# EAGLE board GWLSensorv7 (EAGLE 9.5.2)
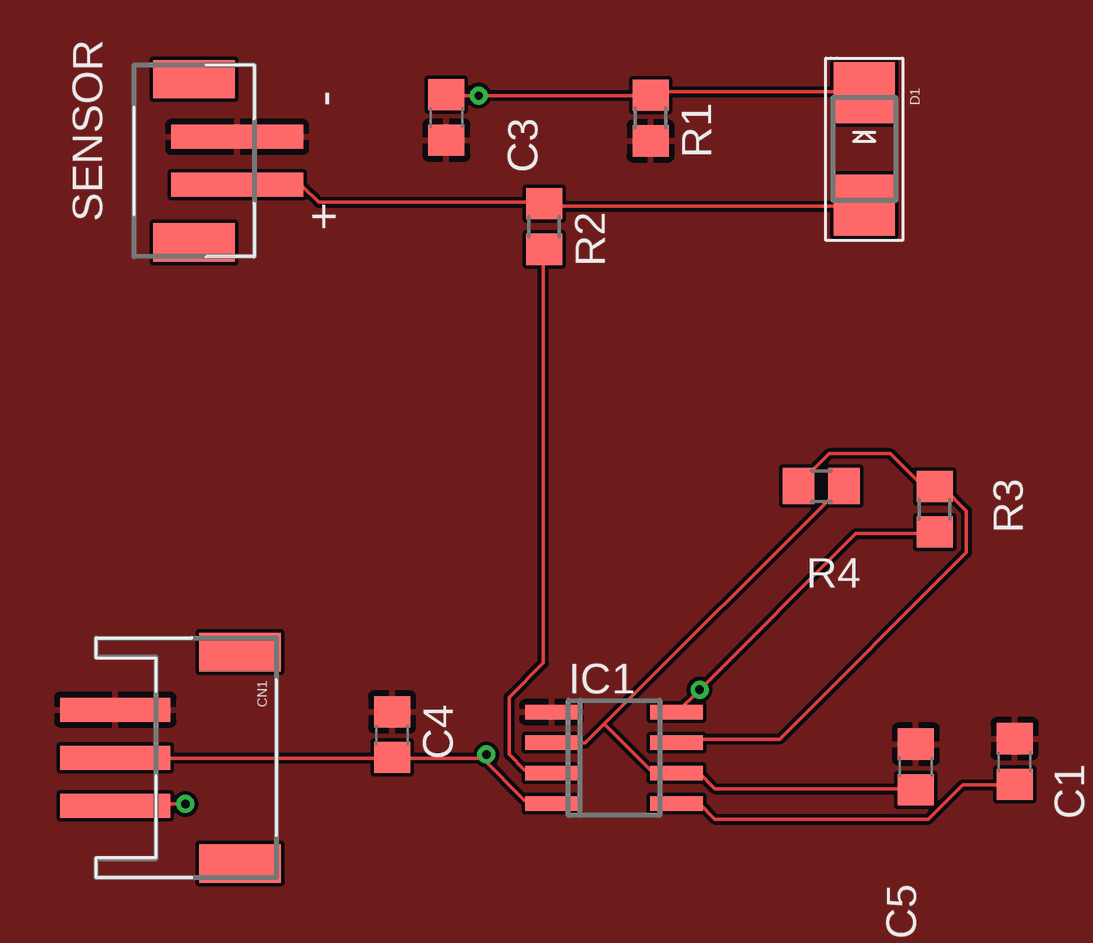
[diagram p0: board, top side]
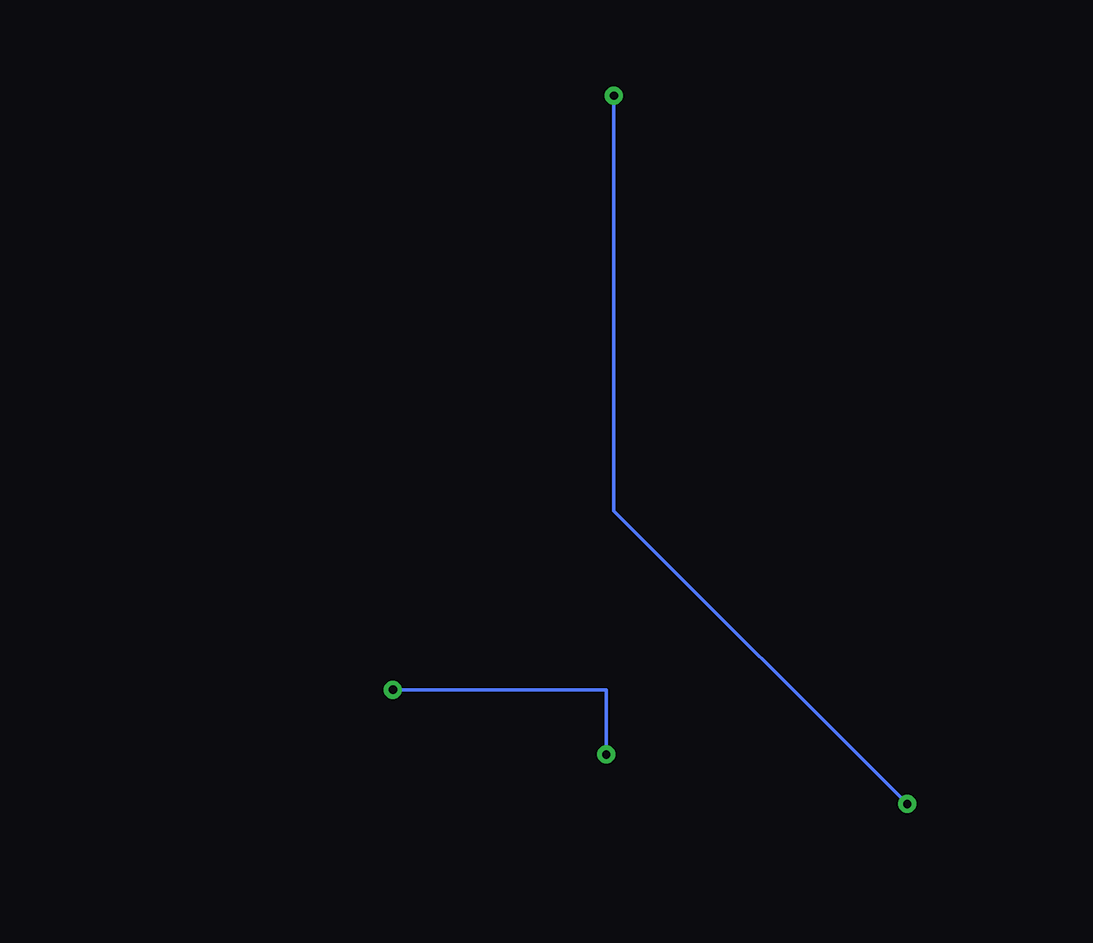
[diagram p1: board, bottom side, seen from below]

No outline drawn. Coordinates in mm, seen from the top.
Copper layers (1*16): Top 0.035mm / dielectric 1.5mm / Bottom 0.035mm
Design rules "default": minimum track width 6mil, minimum drill 0.35mm, track to track 6mil, track to pad 6mil, pad to pad 6mil, via to via 6mil, smd to smd 6mil, copper to edge 40mil, drill to drill 6mil, minimum pad ring 10mil, minimum via ring 8mil, stop-mask expansion 4mil, vias tented up to drill 0mil, thermal gap 10mil

## Footprints (pad centres in the part's own frame; a part is rotated, then mirrored left to right if it is on the bottom)
C0805 = smd 1.3 x 1.5: 1 -0.95,0; 2 0.95,0
JSTPH3 = smd 1 x 4.6: 1 -2,-2.7; 2 0,-2.7; 3 2,-2.7 | smd 1.6 x 3.4: NC1 -4.4,2.5; NC2 4.4,2.5
SMADIODE = smd 2.54 x 2.54: A 2.349,0; C -2.349,0
SO08 = smd 0.6 x 2.2: 1 -1.905,-2.6; 2 -0.635,-2.6; 3 0.635,-2.6; 4 1.905,-2.6; 5 1.905,2.6; 6 0.635,2.6; 7 -0.635,2.6; 8 -1.905,2.6
R0805 = smd 1.3 x 1.5: 1 -0.95,0; 2 0.95,0
JST-PH-2-SMT = smd 1 x 5.5: 1 -1,-1.8; 2 1,-1.8 | smd 1.6 x 3.4: NC1 -3.4,0; NC2 3.4,0

## Placement (x,y rotation side)
C1  10nf  [C0805]  43.28,8.28 270 top
C3  1uF  [C0805]  19.61,35.13 270 top
C4  100nf  [C0805]  17.35,9.4 270 top
C5  470pf  [C0805]  39.17,8.05 90 top
CN1  [JSTPH3]  8.51,8.43 270 top
D1  [SMADIODE]  37.02,33.81 270 top
IC1  LM555D  [SO08]  26.59,8.43 270 top
R1  1M  [R0805]  28.12,35.1 270 top
R2  10K  [R0805]  23.69,30.58 270 top
R3  330  [R0805]  39.95,18.8 90 top
R4  1K6  [R0805]  35.23,19.76 0 top
SENSOR  [JST-PH-2-SMT]  9.09,33.32 90 top

## Library data of the parts
C1 C3-C5 R1-R4 = rcl
CN1 D1 SENSOR = adafruit
IC1 = linear

## Nets
GND: C1.1 C3.2 C4.1 C5.2 CN1.1 IC1.1 R1.2 SENSOR.2
N$1: C3.1 CN1.3 D1.C R1.1
N$2: IC1.7 R3.2 R4.1
N$3: C5.1 IC1.2 IC1.6 R4.2
N$4: C1.2 IC1.5
N$6: D1.A R2.1 SENSOR.1
N$7: IC1.3 R2.2
VCC: C4.2 CN1.2 IC1.4 IC1.8 R3.1

## Tracks (layer width: path | path; a pad name or v marks a point on that pad's centre or on a via)
GND
  pour Top: 0.15,0 0.15,41.55 48.97,41.55 48.97,-0.15 0.08,-0.15
N$1  (via drill 0.35)
  Top 0.152: C3.1 19.68,36.04 v20.95,36.04 28.1,36.04 R1.1 28.26,36.2 36.99,36.2 D1.C | v8.73,6.51 5.87,6.51 CN1.3
  Bottom 0.152: v8.73,6.51 20.95,18.73 v20.95,36.04
N$2
  Top 0.152: R4.1 34.29,19.84 35.56,21.11 38.1,21.11 39.37,19.84 39.85,19.84 R3.2 40.01,19.68 40.32,19.68 41.27,18.73 41.27,16.99 33.5,9.21 29.21,9.21 IC1.7
N$3
  Top 0.152: C5.1 39.05,7.14 30.8,7.14 30.16,7.78 29.21,7.78 IC1.6 29.05,7.94 28.1,7.94 26.19,9.84 | 26.19,9.84 25.4,9.05 24.13,9.05 IC1.2 | 26.19,9.84 36.04,19.68 R4.2
N$4
  Top 0.152: C1.2 43.18,7.3 41.12,7.3 39.69,5.87 30.8,5.87 30.16,6.51 29.21,6.51 IC1.5
N$6
  Top 0.152: SENSOR.1 10.95,32.23 13.65,32.23 14.29,31.59 23.65,31.59 R2.1 23.81,31.43 36.99,31.43 D1.A
N$7
  Top 0.152: R2.2 23.65,29.53 23.65,12.38 22.23,10.95 22.23,8.57 22.86,7.94 23.97,7.94 IC1.3
VCC  (via drill 0.35)
  Top 0.152: R3.1 39.85,17.78 36.67,17.78 v30.16,11.27 29.21,10.32 IC1.8 | 21.11,8.41 17.46,8.41 C4.2 17.3,8.41 5.87,8.41 CN1.2 | 21.11,8.41 22.86,6.67 23.97,6.67 IC1.4 | 21.11,8.41 v21.27,8.57
  Bottom 0.152: v30.16,11.27 21.27,11.27 v21.27,8.57